# Altium PCB SuperKnob.PcbDoc
Units mil, origin at the board's own origin, x right, y up, seen from the top; angles counter-clockwise.
Board outline 1732.28 x 1732.28 mil, 4 copper layers (Layer 1, Layer 2, Layer 3, Layer 4), stack 23.756 mil thick; 76 components, 55 nets, 268 pads, 226 vias.
Unrouted connection lines stored in the file: 57.
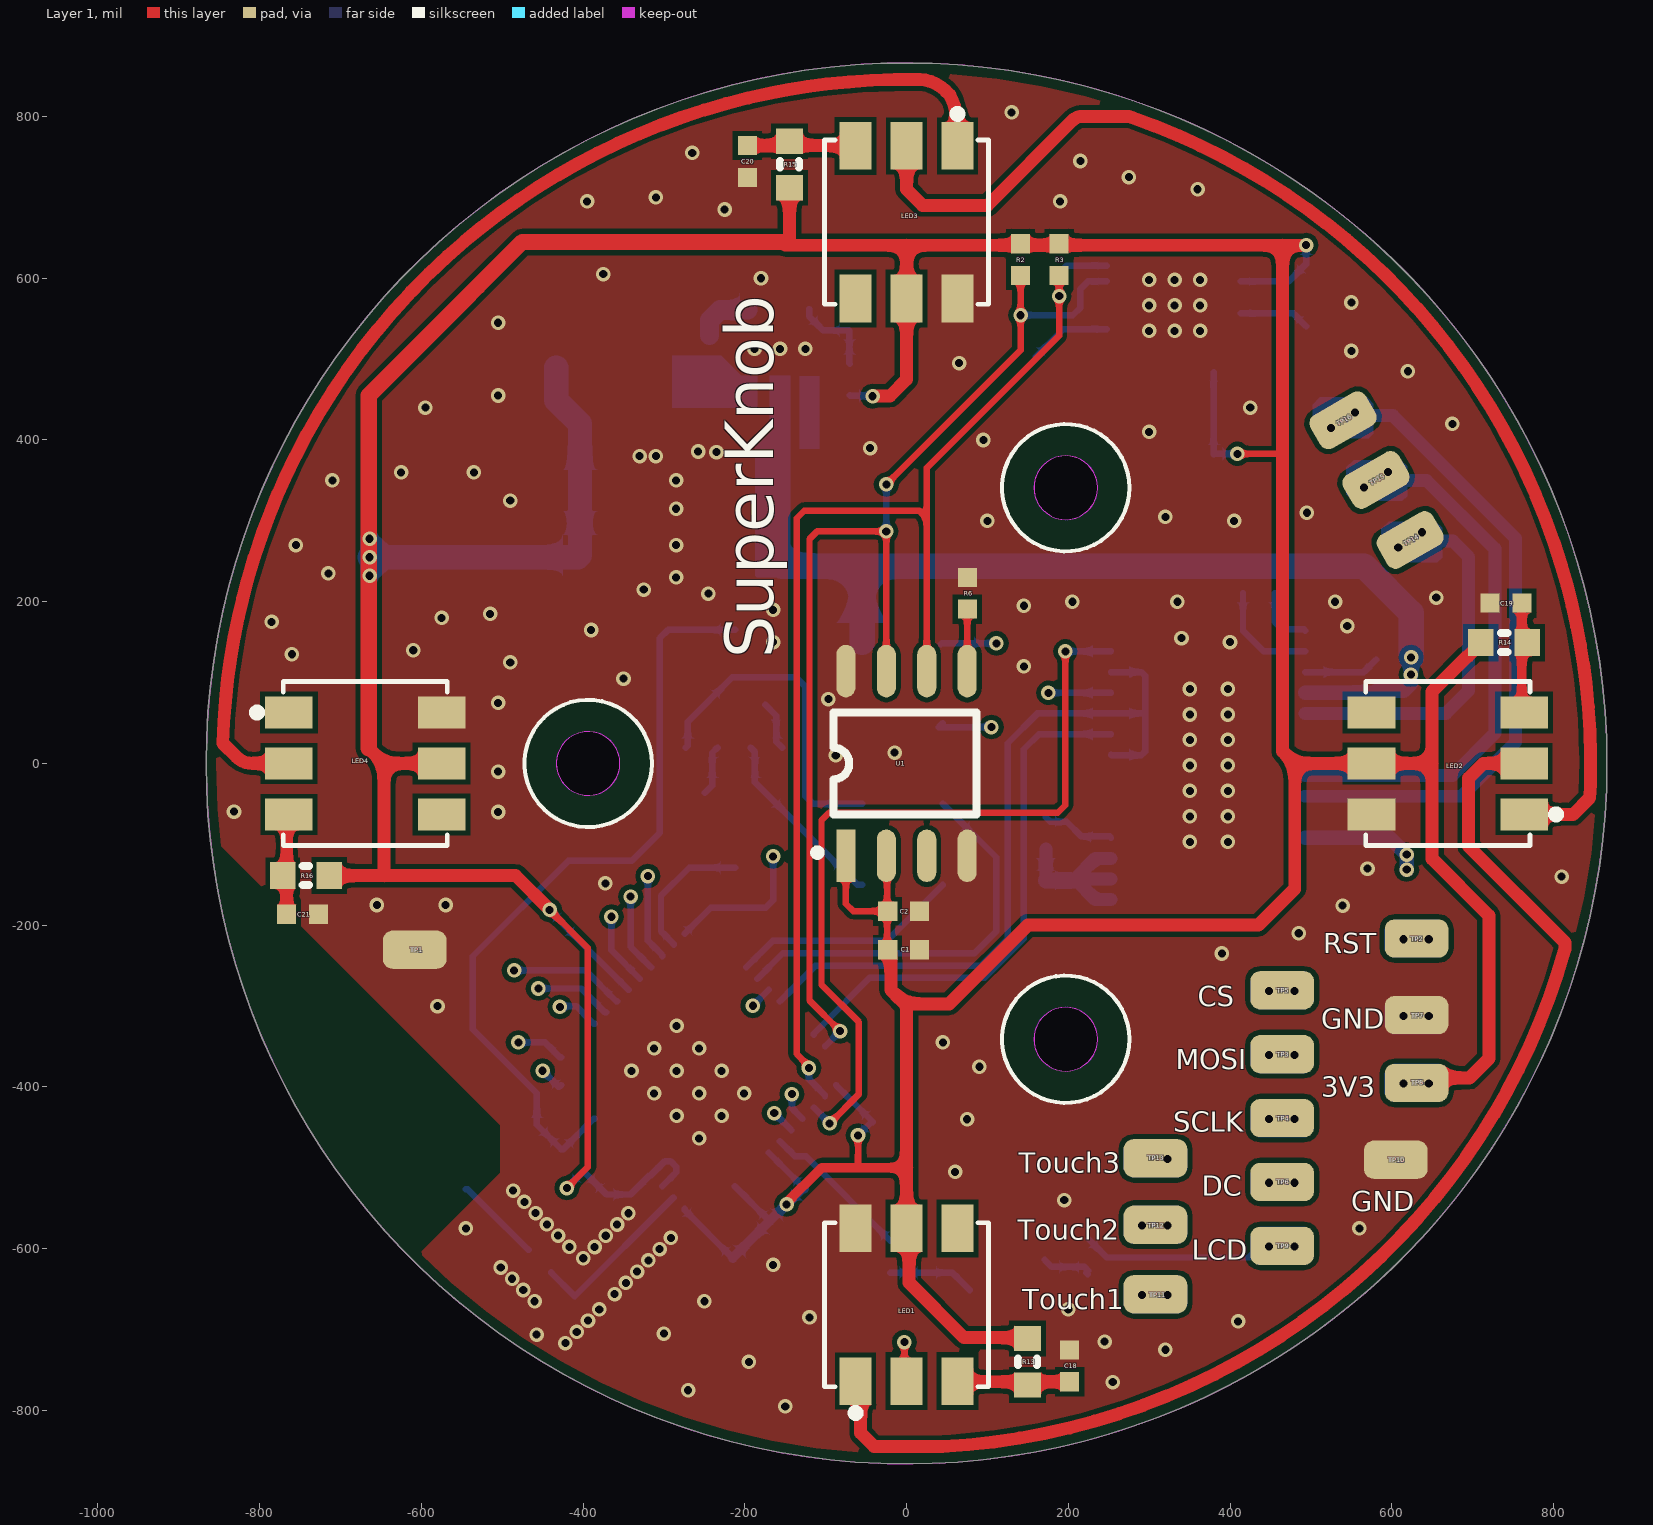
[diagram p0: Layer 1 view]
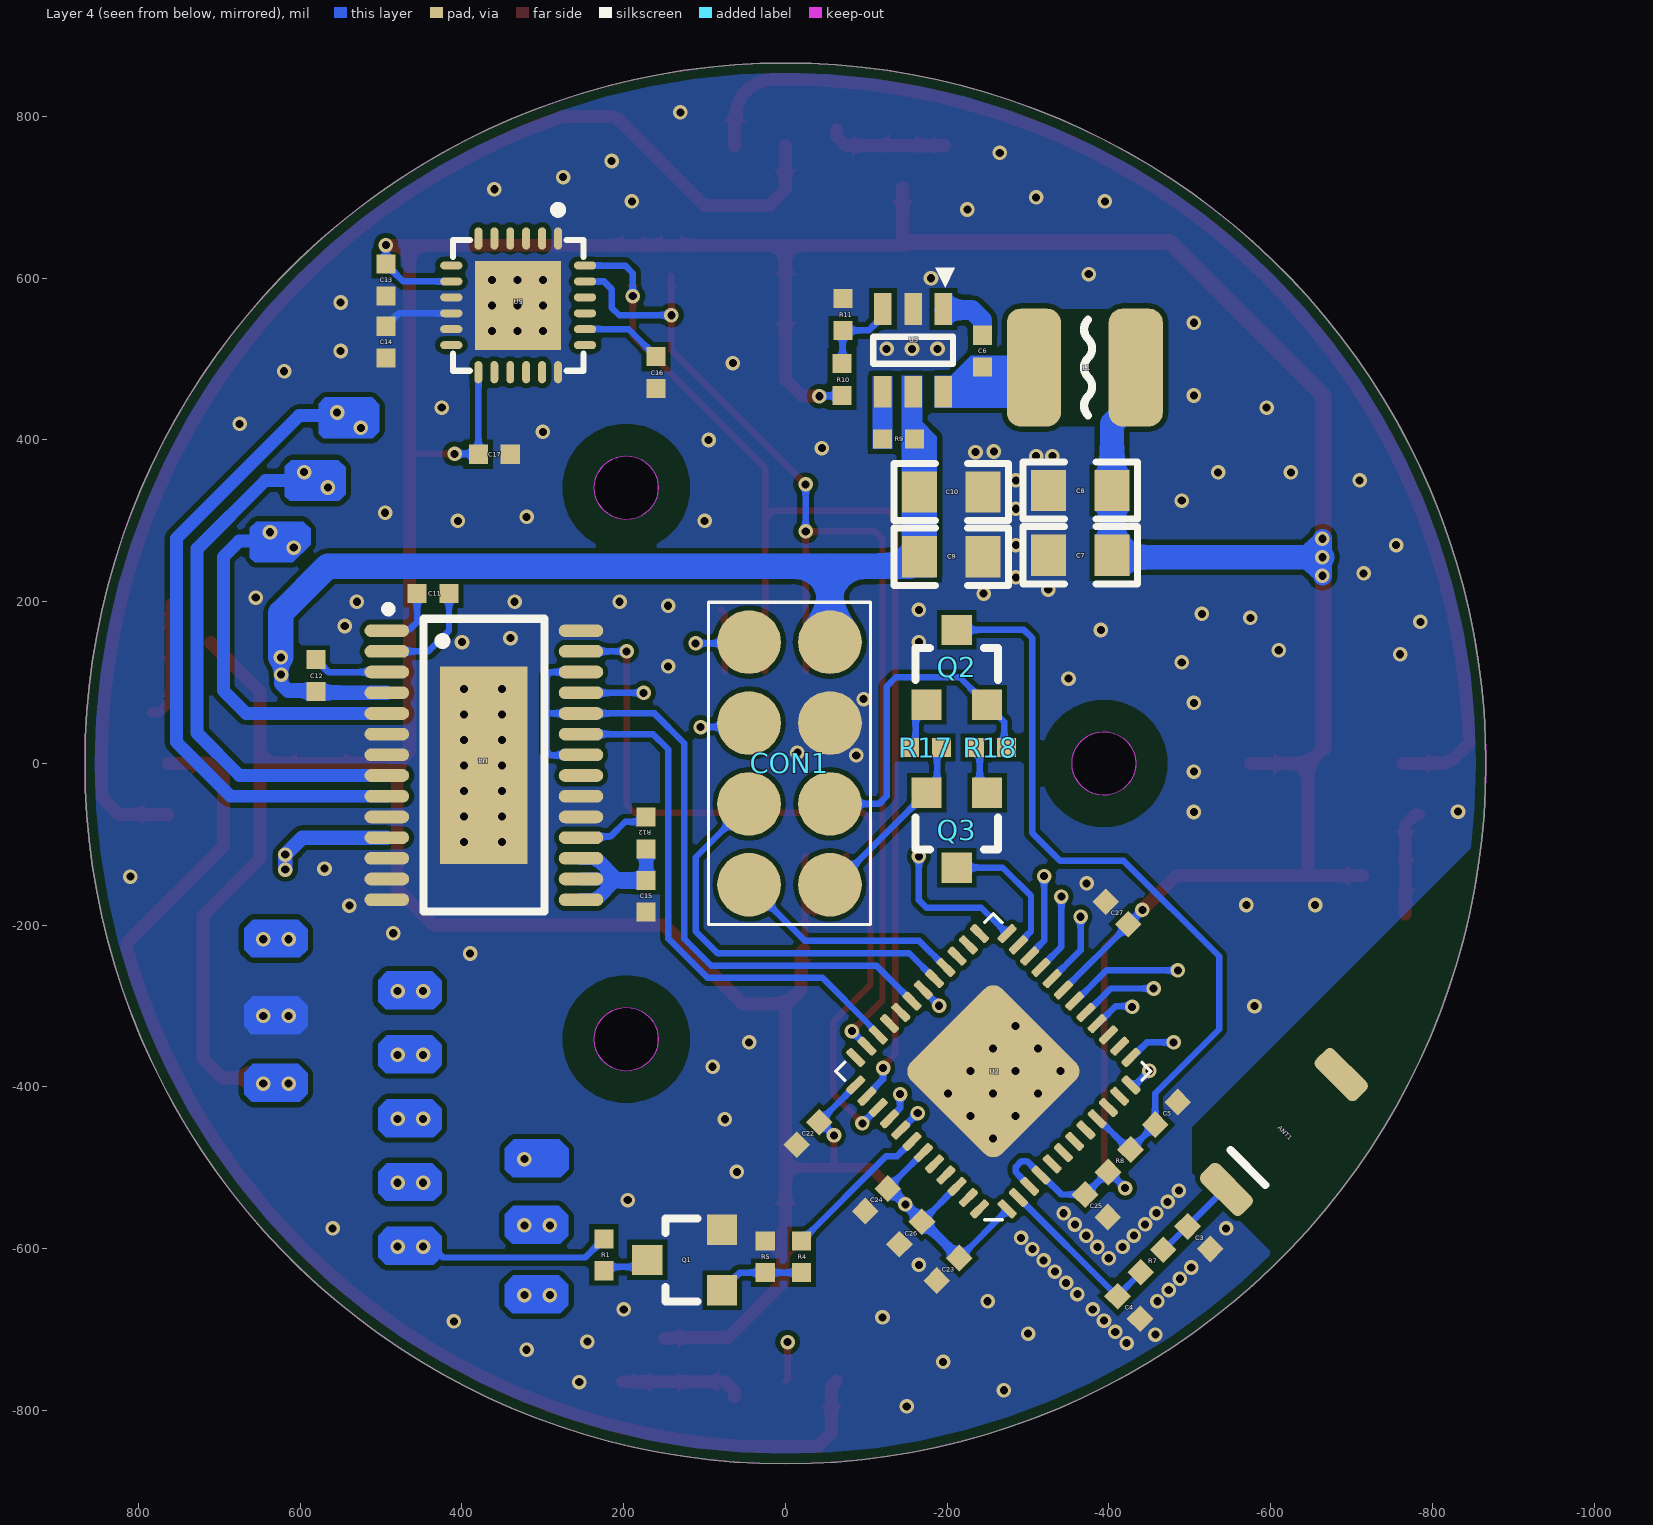
[diagram p1: Layer 4 view, seen from below]
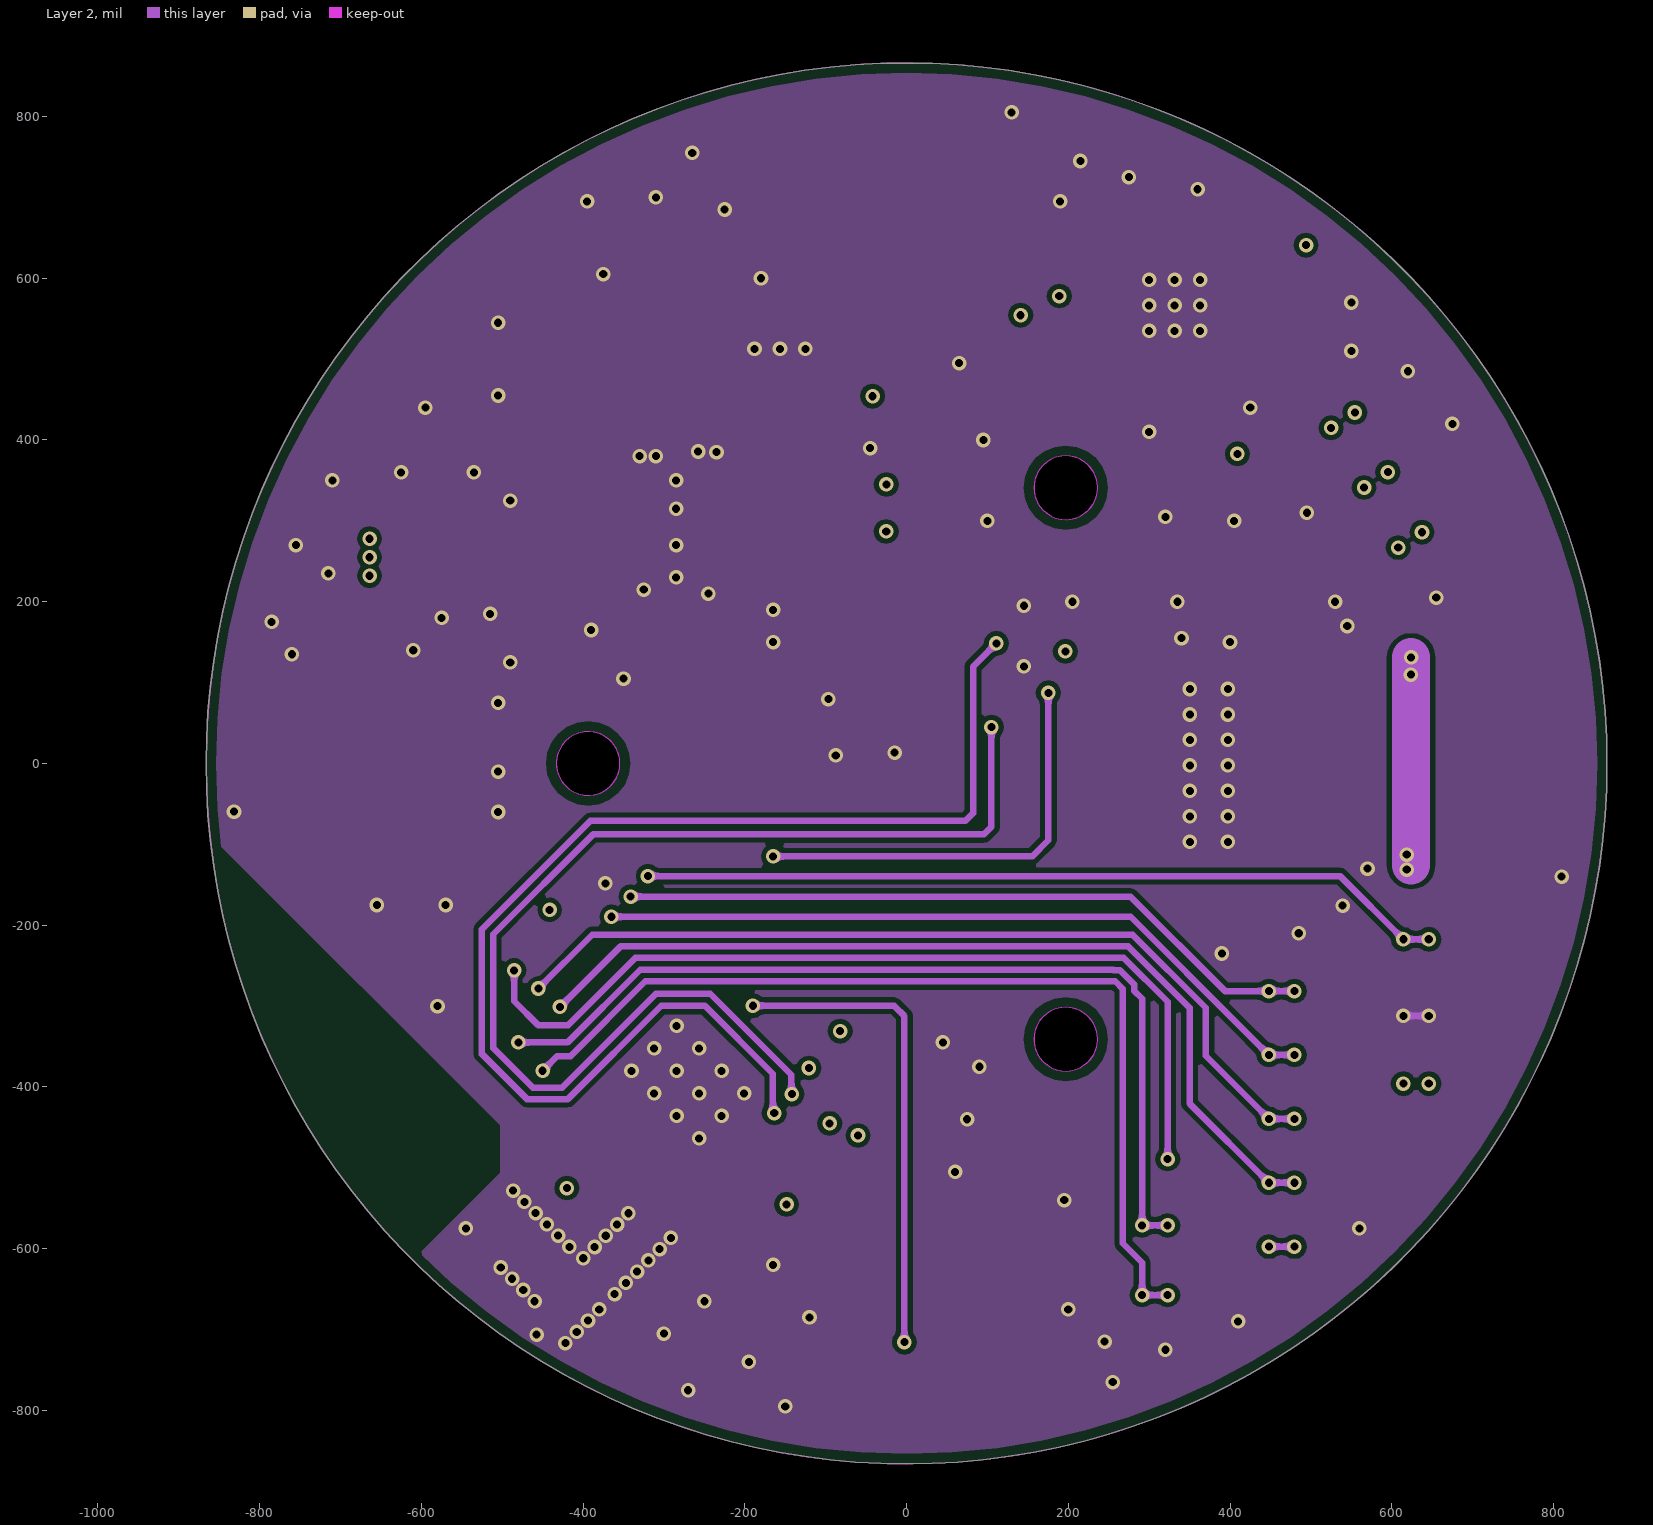
[diagram p2: Layer 2]
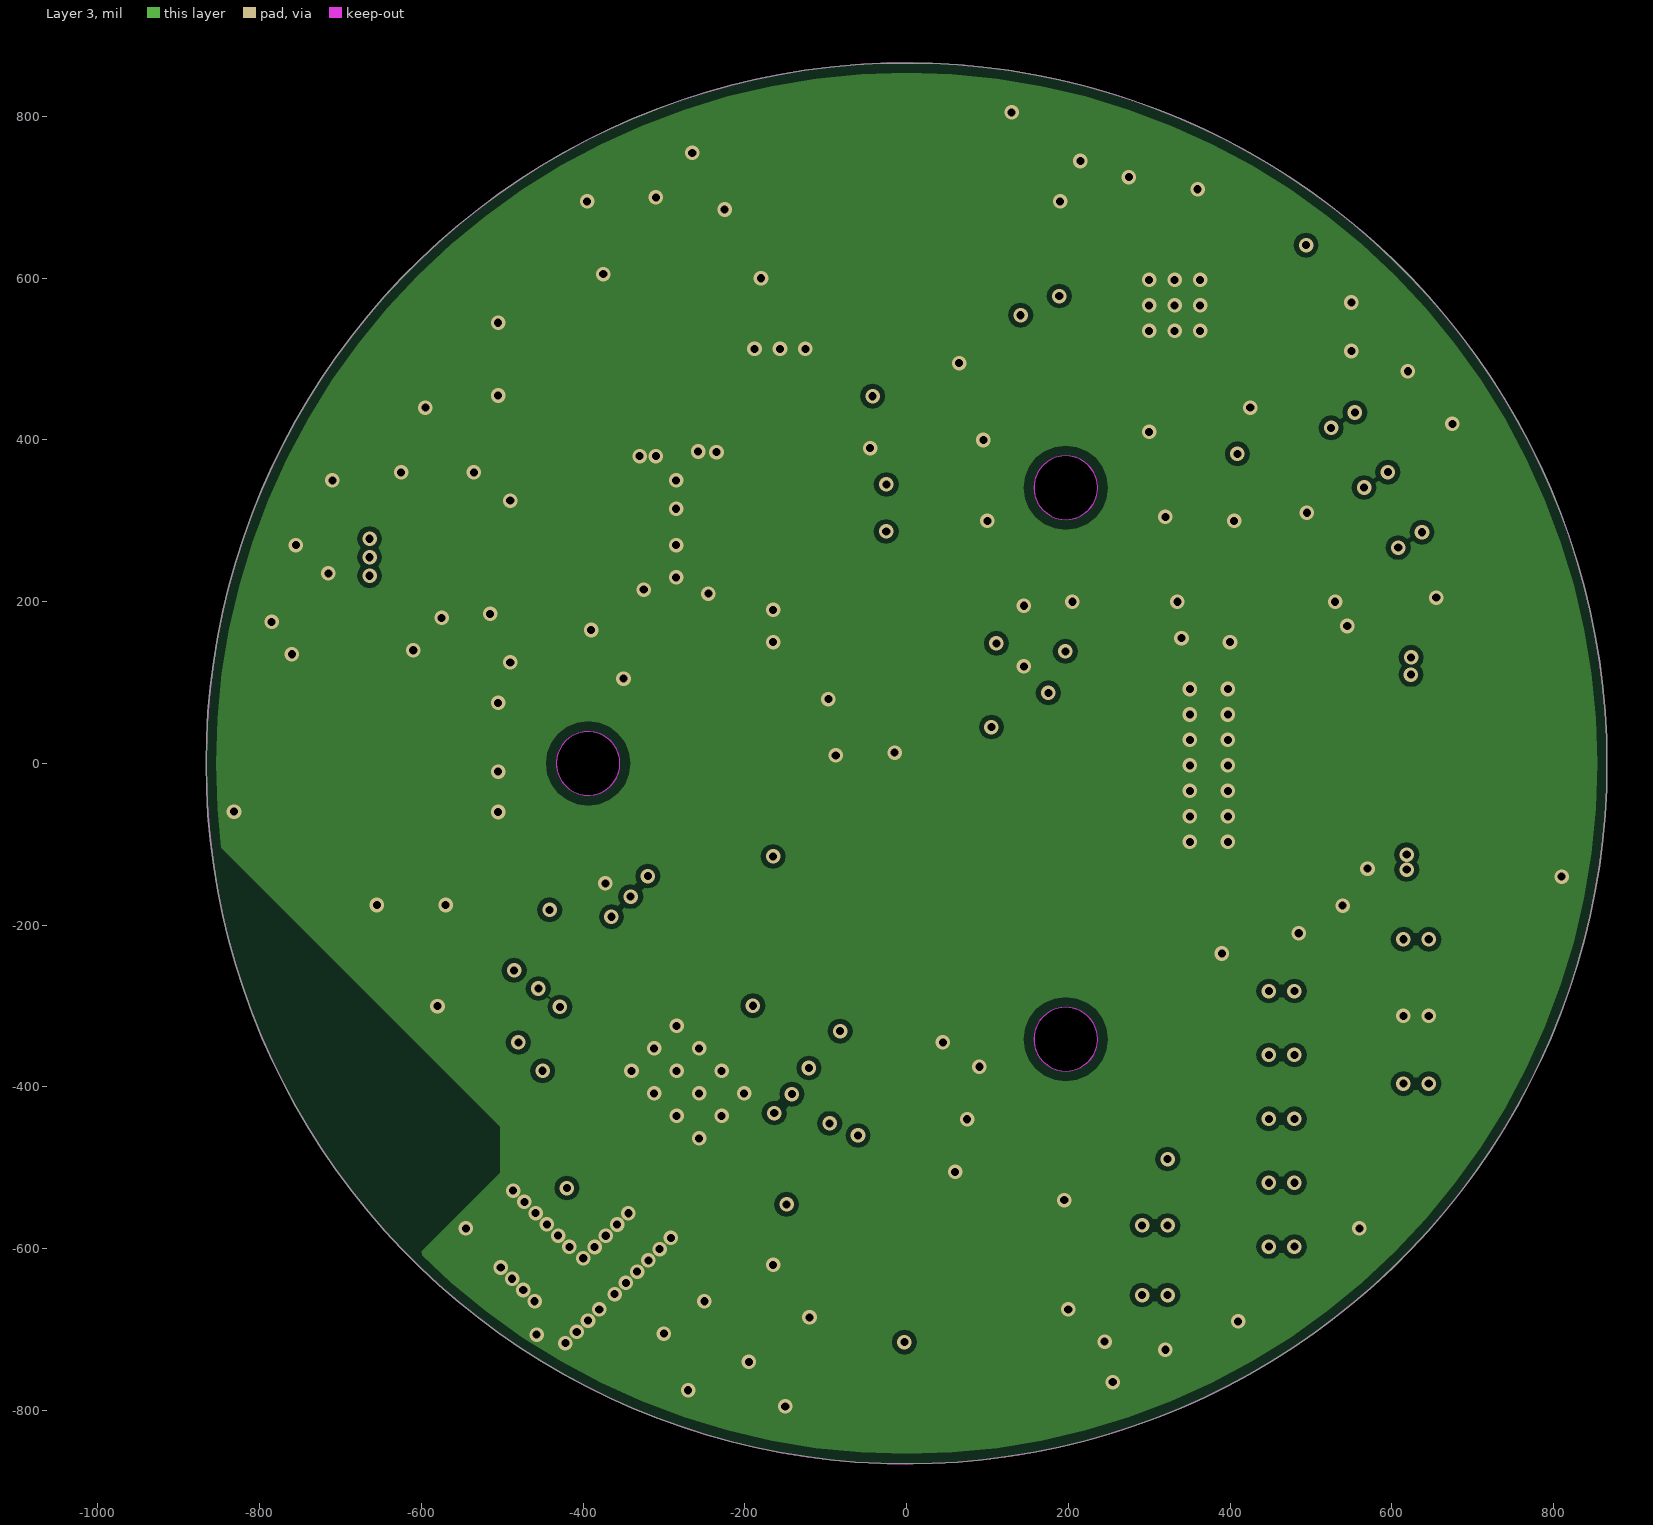
[diagram p3: Layer 3]
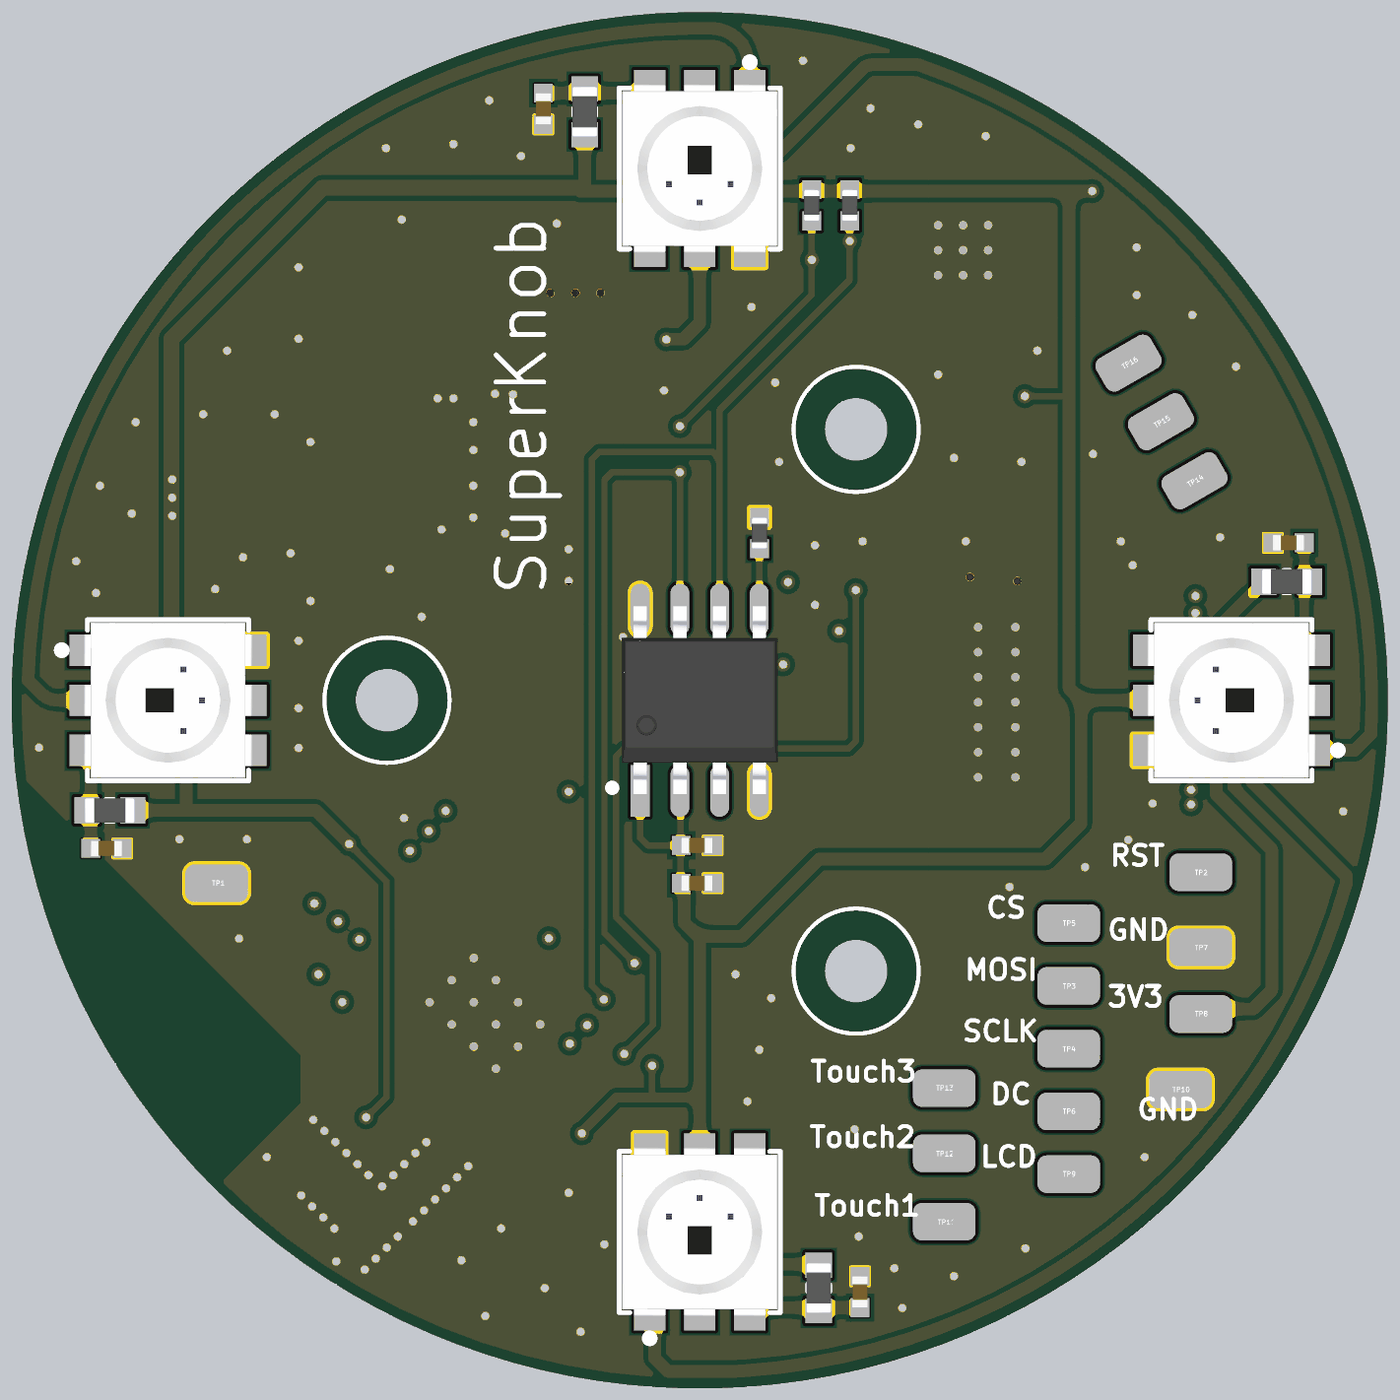
[diagram p4: 3D render of the assembled board from above, using the file's embedded part models]
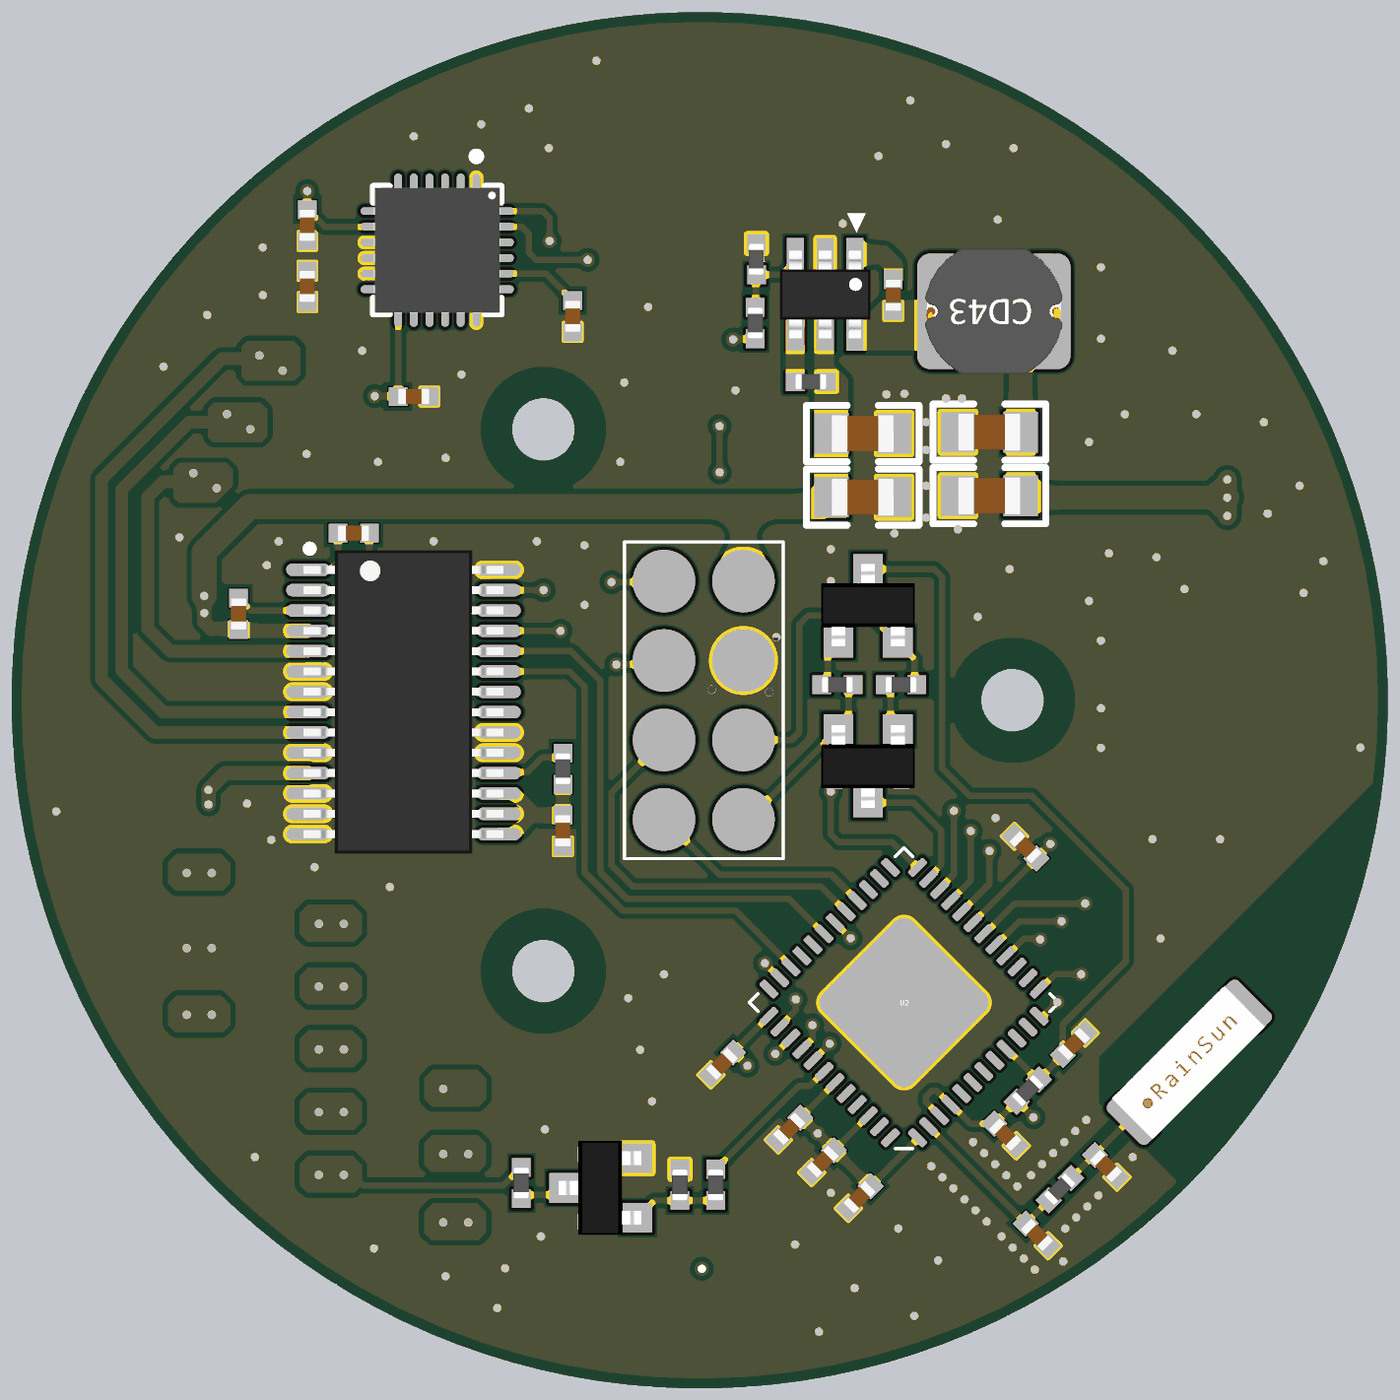
[diagram p5: 3D render of the assembled board from below, using the file's embedded part models]

## Layer stack, top to bottom
Top Solder: solder mask 0.4, Solder Resist, Dk 3.5
Layer 1: signal copper 1.4
Dielectric 2: prepreg 2.8, PP-006, Dk 4.1
Layer 2: signal copper 1.378
Dielectric 1: dielectric 12.6, FR-4, Dk 4.8
Layer 3: signal copper 1.378
Dielectric 3: prepreg 2.8, PP-006, Dk 4.1
Layer 4: signal copper 1.4
Bottom Solder: solder mask 0.4, Solder Resist, Dk 3.5

## Board outline
-866.14,0 ccw(c0,0) 0,-866.14 ccw(c0,0) 866.14,0 ccw(c0,0) 0,866.14 ccw(c0,0)
cut-out: 157.48,340.95 ccw(c196.85,340.95) 196.85,301.58 ccw(c196.85,340.95) 236.22,340.95 ccw(c196.85,340.95) 196.85,380.32 ccw(c196.85,340.95)
cut-out: 157.48,-340.95 ccw(c196.85,-340.95) 196.85,-380.32 ccw(c196.85,-340.95) 236.22,-340.95 ccw(c196.85,-340.95) 196.85,-301.58 ccw(c196.85,-340.95)
cut-out: -393.7,-39.37 ccw(c-393.7,0) -354.33,0 ccw(c-393.7,0) -393.7,39.37 ccw(c-393.7,0) -433.07,0 ccw(c-393.7,0)

## Design rules (kind name [scope] priority, off if disabled: settings)
Clearance Clearance_UVW1 [InComponent('TP14') vs InComponent('TP15')] p1: gap=0 ignorepadtopadclearanceinfootprint=FALSE
Clearance Clearance_UVW [InComponent('R15') vs InComponent('TP16')] p2: gap=0 ignorepadtopadclearanceinfootprint=FALSE
Clearance Clearance_outline [OnLayer('Keep-Out Layer')] p3: gap=12 ignorepadtopadclearanceinfootprint=FALSE
Clearance [All] p4: gap=6 ignorepadtopadclearanceinfootprint=FALSE except(8: Arc-Via Arc-Hole Track-Via Track-Hole SMDPad-SMDPad SMDPad-Via SMDPad-Hole THPad-Via THPad-Hole Via-Via Via-Hole Fill-Hole Poly-Hole Region-Hole Text-Hole)
DiffPairsRouting [All] p1: maxlimit=10 minlimit=8 mostfreqgap=8 toplayer_minwidth=8 toplayer_maxwidth=8 toplayer_prefwidth=8 midlayer1_minwidth=8 midlayer1_maxwidth=8 midlayer1_prefwidth=8 midlayer2_minwidth=8 midlayer2_maxwidth=8 midlayer2_prefwidth=8 bottomlayer_minwidth=8 bottomlayer_maxwidth=8 bottomlayer_prefwidth=8 maxuncoupledlength=500
HoleToHoleClearance [All] p1: gap=0 allowstackedmicrovias=TRUE
MinimumSolderMaskSliver [All] p1: minsoldermaskwidth=0
PolygonConnect [All] p1: connectstyle=Direct reliefconductorwidth=10 reliefentries=4 polygonreliefangle="90 Angle" airgapwidth=10
RoutingVias [All] p1: holewidth=10 width=18 viastyle="Through Hole" minholewidth=10 minwidth=18 maxholewidth=10 maxwidth=18
SilkToSilkClearance [All] p1: silktosilkclearance=0
SilkToSolderMaskClearance [IsPad] p1: minsilkscreentomaskgap=0 clearancetoexposedcopper=TRUE
SolderMaskExpansion [All] p1: expansion=4 istentingtop=FALSE
Width [All] p1: maxlimit=100 minlimit=6 preferedwidth=6
25 further rules are at their usual default settings.

## Components (designator, comment, footprint, x,y, rotation, side; value= is the part's Value field where it differs from the comment)
ANT1 "RAINSUN" ANT-Rainsun-AN5120 -615.91,-456.04 r135 bottom
C1 "100nF/25V" CAPC_0402 -3.5,-230.32 r180 top value=0.1u
C2 "10uF/10V" CAPC_0402 -3.5,-182.7 r180 top value=0.1u
C3 "NC" CAPC_0402 -511.25,-586.3 r45 bottom value=0.1u
C4 "NC" CAPC_0402 -424.51,-672.83 r45 bottom value=0.1u
C5 "100nF/25V" CAPC_0402 -471.1,-432.7 r315 bottom value=0.1u
C6 "10nF/25V" CAPC_0402 -243.62,509.84 r90 bottom value=0.1u
C7 "22uF/6.3V" CAPC_0805 -364.48,257.42 r180 bottom value=0.1u
C8 "22uF/6.3V" CAPC_0805 -364.48,337.47 r180 bottom value=0.1u
C9 "10uF/16V" CAPC_0805 -205.18,255.64 r0 bottom value=0.1u
C10 "10uF/16V" CAPC_0805 -205.18,335.64 r0 bottom value=0.1u
C11 "10nF/25V" CAPC_0402 435.72,210.37 r0 bottom value=0.1u
C12 "100nF/25V" CAPC_0402 580.53,108.71 r90 bottom value=0.1u
C13 "10nF/25V" CAPC_0402 494.02,597.86 r90 bottom value=0.1u
C14 "100nF/25V" CAPC_0402 494.02,520.99 r270 bottom value=0.1u
C15 "470nF/25V" CAPC_0402 172.31,-164.18 r90 bottom value=0.1u
C16 "2.2nF/25V" CAPC_0402 160,483.38 r270 bottom value=0.1u
C17 "100nF/25V" CAPC_0402 360.01,382.36 r0 bottom value=0.1u
C18 "100nF/25V" CAPC_0402 201.72,-744.85 r90 top value=0.1u
C19 "100nF/25V" CAPC_0402 741.13,198.19 r180 top value=0.1u
C20 "100nF/25V" CAPC_0402 -196.9,744.44 r90 top value=0.1u
C21 "100nF/25V" CAPC_0402 -746.79,-186.49 r180 top value=0.1u
C22 "1uF/10V" CAPC_0402 -27.95,-457.56 r135 bottom value=0.1u
C23 "1uF/10V" CAPC_0402 -201.02,-625.58 r135 bottom value=0.1u
C24 "100pF/25V" CAPC_0402 -112.67,-539.51 r315 bottom value=0.1u
C25 "100nF/25V" CAPC_0402 -384.5,-546.92 r45 bottom value=0.1u
C26 "100nF/25V" CAPC_0402 -154.79,-580.63 r135 bottom value=0.1u
C27 "100nF/25V" CAPC_0402 -410,-185 r225 bottom value=0.1u
CON1 "POGOPIN_8pin" POGOPIN_8pin -5,0 r270 bottom
L1 "2.2uH/2A" Inductor_CD_43 -370.21,489.57 r0 bottom value=WPN4020H2R2MT
LED1 "WS2812S-W" LED-SMD_6P-L5.0-W5.0-TL 0,-669.29 r90 top
LED2 "WS2812S-W" LED-SMD_6P-L5.0-W5.0-TL 669.29,0 r180 top
LED3 "WS2812S-W" LED-SMD_6P-L5.0-W5.0-TL 0,669.29 r270 top
LED4 "WS2812S-W" LED-SMD_6P-L5.0-W5.0-TL -669.29,0 r0 top
Q1 "AO3400" SOT23_3 124.69,-613.88 r180 bottom
Q2 "MMBT3904" SOT23_3 -211.87,118.9 r270 bottom
Q3 "MMBT3904" SOT23_3 -211.87,-82.57 r90 bottom
R1 "10R" RESC_0402#1 224.59,-607.57 r90 bottom value=22R
R2 "10K" RESC_0402#1 140.94,623.02 r90 top value=22R
R3 "10K" RESC_0402#1 188.74,623.02 r90 top value=22R
R4 "100R" RESC_0402#1 -20,-610 r270 bottom value=22R
R5 "10K" RESC_0402#1 25,-610 r90 bottom value=22R
R6 "1K" RESC_0402#1 75.17,210.5 r90 top value=22R
R7 "0R" RESC_0402#1 -453.16,-615.29 r315 bottom value=22R
R8 "10K" RESC_0402#1 -412.89,-491.28 r135 bottom value=22R
R9 "100K" RESC_0402#1 -139.87,401 r0 bottom value=22R
R10 "100K" RESC_0402#1 -69.97,474.84 r90 bottom value=22R
R11 "22.2K" RESC_0402#1 -71.34,555.17 r90 bottom value=22R
R12 "10K" RESC_0402#2 172.31,-86.13 r270 bottom value=22R
R13 "150R" RESC_0603 149.7,-739.81 r270 top value=22R
R14 "150R" RESC_0603 738.93,149.42 r0 top value=22R
R15 "150R" RESC_0603 -144.75,740.79 r90 top value=22R
R16 "150R" RESC_0603 -742.64,-138.62 r180 top value=22R
R17 "12K" RESC_0402#1 -173.28,19.62 r180 bottom value=22R
R18 "12K" RESC_0402#1 -253.4,19.62 r180 bottom value=22R
TP1 "TP" TP -608.11,-230.32 r90 top
TP2 "TP" TP 630.72,-216.51 r270 top
TP3 "TP" TP 464.46,-359.53 r270 top
TP4 "TP" TP 464.46,-438.53 r270 top
TP5 "TP" TP 464.46,-280.53 r270 top
TP6 "TP" TP 464.46,-517.53 r270 top
TP7 "TP" TP 630.72,-311.17 r270 top
TP8 "TP" TP 630.72,-395.01 r270 top
TP9 "TP" TP 464.46,-596.53 r270 top
TP10 "TP" TP 605,-490 r90 top
TP11 "TP" TP 307.84,-656.41 r270 top
TP12 "TP" TP 307.84,-570.34 r270 top
TP13 "TP" TP 307.84,-488.25 r270 top
TP14 "U" TP 622.72,276.28 r120 top
TP15 "V" TP 580.47,350.57 r120 top
TP16 "W" TP 539.72,424.35 r120 top
U1 "AS5600-ASOT" SOIC_8 0,0 r0 top locked
U2 "ESP32_SIP" QFN-48_7X7 -257.07,-380.55 r45 bottom locked
U3 "LP6460B6F" SOT23_6 -157.91,510.78 r270 bottom
U4 "DRV8313PWP" TSSOP_28 372.89,-2.14 r270 bottom
U5 "MPU6050" QFN-24 330.46,566.49 r270 bottom

## Footprints (in the part's own frame and the unit in brackets; to place one, negate y for a bottom-side part, rotate by r counter-clockwise, add the part's x,y. Pads: shape width x height; smd on the part's side, far side on the other; paste and mask are expansions set on the pad)
ANT-Rainsun-AN5120 [mm] "选择焊盘"
  rrect50% 0.8x1.8 smd: 1(-2.54,0) ""(2.563,0)
  silkscreen extent -1.57,-0.76 -1.57,0.79, body extent -2.57,-0.91 2.54,0.94, height 1.32
CAPC_0402 [mm]
  rect 0.6x0.6 smd mask+0.051: 1(-0.5,0) 2(0.5,0)
  body extent -0.5,-0.25 0.5,0.25, height 0.5
CAPC_0805 [mm]
  rect 1.1x1.3 smd: 1(-1,0) 2(1,0)
  silkscreen extent -1.8,-0.9 1.8,0.9, body extent -1,-0.6 1,0.6, height 0.95
Inductor_CD_43 [mm]
  rrect50% 1.7x3.7 smd: 1(-1.6,0) 2(1.6,0)
  silkscreen extent -0.22,-1.5 0.02,1.5, body extent -2.2,-2 2.2,2, height 3.25
LED-SMD_6P-L5.0-W5.0-TL [mm]
  rect 1.5x1 smd: 1(-2.4,1.6) 2(-2.4,0) 3(-2.4,-1.6) 4(2.4,-1.6) 5(2.4,0) 6(2.4,1.6)
  silkscreen extent -3.52,-2.58 2.58,2.58, body extent -2.7,-2.47 2.7,2.47, height 1.6
POGOPIN_8pin [mm] "POGOPIN"
  round 2 smd: 1(-3.81,1.27) 2(-1.27,1.27) 3(1.27,1.27) 4(3.81,1.27) 5(3.81,-1.27) 6(1.27,-1.27) 7(-1.27,-1.27) 8(-3.81,-1.27)
  silkscreen extent -5.06,-2.54 5.06,2.54
QFN-24 [mm] "QFN, 24-Leads, Body 4.1x4.1mm (max), Pitch 0.50mm, IPC Low Density"
  oval 0.7x0.25 smd: 1(-2.1,1.25) 2(-2.1,0.75) 3(-2.1,0.25) 4(-2.1,-0.25) 5(-2.1,-0.75) 6(-2.1,-1.25) 13(2.1,-1.25) 14(2.1,-0.75) 15(2.1,-0.25) 16(2.1,0.25) 17(2.1,0.75) 18(2.1,1.25)
  oval 0.25x0.7 smd: 7(-1.25,-2.1) 8(-0.75,-2.1) 9(-0.25,-2.1) 10(0.25,-2.1) 11(0.75,-2.1) 12(1.25,-2.1) 19(1.25,2.1) 20(0.75,2.1) 21(0.25,2.1) 22(-0.25,2.1) 23(-0.75,2.1) 24(-1.25,2.1)
  rect 2.8x2.7 smd: 18(0,0)
  silkscreen extent -3.12,-2.05 2.05,2.05, body extent -2.02,-2.02 2.02,2.02, height 0.95
QFN-48_7X7 [mm]
  rrect20% 4.064x4.064 smd: 0(0,0)
  rrect50% 0.675x0.25 smd: 1(-3.363,2.75) 2(-3.363,2.25) 3(-3.363,1.75) 4(-3.363,1.25) 5(-3.363,0.75) 6(-3.362,0.25) 7(-3.362,-0.25) 8(-3.363,-0.75) 9(-3.363,-1.25) 10(-3.363,-1.75) 11(-3.363,-2.25) 12(-3.363,-2.75) 25(3.363,-2.75) 26(3.363,-2.25) 27(3.363,-1.75) 28(3.363,-1.25) 29(3.363,-0.75) 30(3.362,-0.25) 31(3.362,0.25) 32(3.363,0.75) 33(3.363,1.25) 34(3.363,1.75) 35(3.363,2.25) 36(3.363,2.75)
  rrect50% 0.25x0.675 smd: 13(-2.75,-3.363) 14(-2.25,-3.363) 15(-1.75,-3.363) 16(-1.25,-3.363) 17(-0.75,-3.363) 18(-0.25,-3.362) 19(0.25,-3.362) 20(0.75,-3.363) 21(1.25,-3.363) 22(1.75,-3.363) 23(2.25,-3.363) 24(2.75,-3.363) 37(2.75,3.363) 38(2.25,3.363) 39(1.75,3.363) 40(1.25,3.363) 41(0.75,3.363) 42(0.25,3.362) 43(-0.25,3.362) 44(-0.75,3.363) 45(-1.25,3.363) 46(-1.75,3.363) 47(-2.25,3.363) 48(-2.75,3.363)
  silkscreen extent -3.5,-3.5 3.5,3.5, body extent -3.5,-3.5 3.5,3.5, height 1
RESC_0402#1 [mm]
  rect 0.6x0.6 smd: 1(-0.5,0) 2(0.5,0)
  body extent -0.5,-0.25 0.5,0.25, height 0.38
RESC_0402#2 [mm]
  rect 0.6x0.6 smd mask+0.051: 1(-0.5,0) 2(0.5,0)
  body extent -0.5,-0.25 0.5,0.25, height 0.38
RESC_0603 [mm]
  rect 0.8x0.85 smd: 1(-0.73,0) 2(0.73,0)
  silkscreen extent -0.1,-0.3 0.1,0.3, body extent -0.8,-0.4 0.8,0.4, height 0.38
SOIC_8 [mm]
  rect 0.6x1.65 smd: 1(-1.905,-2.9)
  oval 0.6x1.65 smd: 2(-0.635,-2.9) 3(0.635,-2.9) 4(1.905,-2.9) 5(1.905,2.9) 6(0.635,2.9) 7(-0.635,2.9) 8(-1.905,2.9)
  silkscreen extent -2.9,-2.9 2.2,1.6, body extent -2.5,-3.01 2.5,3.01, height 1.75
SOT23_3 [mm]
  rect 0.95x0.95 smd: 1(1.175,-0.95) 2(1.175,0.95) 3(-1.175,0)
  silkscreen extent -0.6,-1.3 0.4,1.3, body extent -1.34,-1.5 1.3,1.5, height 1.08
SOT23_6 [mm]
  rect 1x0.55 smd: 1(-1.3,0.95) 2(-1.3,0) 3(-1.3,-0.95) 4(1.3,-0.95) 5(1.3,0) 6(1.3,0.95)
  silkscreen extent -2.6,-1.25 0.43,1.3, body extent -1.4,-1.45 1.4,1.45, height 1.45
TP [mm]
  rrect50% 1.2x2 smd: 1(0,0)
TSSOP_28 [mm] "0.65"
  oval 0.4x1.4 smd: 1(-4.225,-3.05) 2(-3.575,-3.05) 3(-2.925,-3.05) 4(-2.275,-3.05) 5(-1.625,-3.05) 6(-0.975,-3.05) 7(-0.325,-3.05) 8(0.325,-3.05) 9(0.975,-3.05) 10(1.625,-3.05) 11(2.275,-3.05) 12(2.925,-3.05) 13(3.575,-3.05) 14(4.225,-3.05) 15(4.225,3.05) 16(3.575,3.05) 17(2.925,3.05) 18(2.275,3.05) 19(1.625,3.05) 20(0.975,3.05) 21(0.325,3.05) 22(-0.325,3.05) 23(-0.975,3.05) 24(-1.625,3.05) 25(-2.275,3.05) 26(-2.925,3.05) 27(-3.575,3.05) 28(-4.225,3.05)
  rect 6.2x2.75 smd: 29(0,0)
  silkscreen extent -5,-3.1 4.6,1.9, body extent -4.85,-3.2 4.85,3.2, height 1.2

## Part data
ANT1: library part ANT-Rainsun-AP5120, "贴片天线"
C1 C2 C3 C4 C5 C6 C7 C8 C9 C10 C11 C12 C13 C14 C15 C16 C17 C18 C19 C20 C21 C22 C23 C24 C25 C26 C27: library part 电容-0402, "贴片电容"
CON1: "磁吸连接器"
L1: library part PL4020, "贴片电感", Material name=功率电感, PCB DECAL=PL4020
LED1 LED2 LED3 LED4: BOM_JLCPCB Part Class="Extended Part", BOM_Manufacturer=Worldsemi, BOM_Manufacturer Part=WS2812S-W, BOM_Supplier=LCSC, BOM_Supplier Part=C114584, Contributor=LCSC, spicePre=L, spiceSymbolName=WS2812S-W
Q1: library part FH3400C, BOM_JLCPCB Part Class="Extended Part", BOM_Manufacturer=鑫飞宏, BOM_Manufacturer Part=FH3400C, BOM_Supplier=LCSC, BOM_Supplier Part=C2940037, Contributor=LCSC, spicePre=Q, spiceSymbolName=FH3400C
Q2 Q3: library part SMT_TRIODE_NPN, "Surface mount NPN transistor, package SOT-23"
R1 R2 R3 R4 R5 R6 R7 R8 R9 R10 R11 R12 R13 R14 R15 R16 R17 R18: library part 电阻-0402, "贴片电阻"
TP1 TP2 TP3 TP4 TP5 TP6 TP7 TP8 TP9 TP10 TP11 TP12 TP13: "测试点"
TP14 TP15 TP16: library part TP, "测试点"
U1: "磁编码器", BOM_JLCPCB Part Class="Extended Part", BOM_Manufacturer="Advanced Monolithic Systems", BOM_Manufacturer Part=AS5600-ASOT, BOM_Supplier=LCSC, BOM_Supplier Part=C499458, Contributor=LCSC, spicePre=U, spiceSymbolName=AS5600-ASOT
U2: library part ESP32-PICO, "主控芯片"
U3: "DC-DC芯片"
U4: "驱动芯片", BOM_Manufacturer=TI(德州仪器), BOM_Manufacturer Part=DRV8313PWP, BOM_Supplier=LCSC, BOM_Supplier Part=C2863441, Contributor=LCSC, spicePre=U, spiceSymbolName=DRV8313PWP
U5: "六轴传感器"

## Via types
v1: diameter 18, hole 10, Layer 1 to Layer 4, tented both sides, 226 vias

## Nets (pads, with @x,y where several pads share a name; then routed paths per layer and width w, separated by ;. In a path a pad name is that pad's centre, name@x,y a point inside that pad or via, vN(x,y) a via of type N, cw(c..) or ccw(c..) an arc to the next point about the centre after c; other vN are vias at no path point)
3V3: C1.2 C2.2 C7.2 C8.2 C13.2 C17.2 C22.2 C23.2 C24.1 C25.2 C26.2 C27.2 L1.1 LED1.5 LED2.5 LED3.5 LED4.5 R2.2 R3.2 R8.1 R10.1 R13.1 R14.1 R15.1 R16.1 TP8.1 U1.1 U1.2 U2.1 U2.3 U2.4 U2.19 U2.37 U2.43 U2.46 U5.8 U5.13 | length 7861.4
  Layer 1 w8: v1(-441.27,-180.99) -394.1,-228.16 -394.1,-499.1 v1(-420,-525) ; U1.1 -75,-173.33 -65.63,-182.7 C2.2@-24.09,-182.7 ; -60,-500 v1(-60,-460) ; U1.2 -24.09,-115.08 C2.2@-24.09,-182.7 ; C1.2 -24.09,-229.41 C2.2@-24.09,-182.7 ; C2.2 C2.2@-24.09,-182.7 ; v1(409.14,382.84) 462.84,382.84 465,385
  Layer 1 w12: v1(-148.39,-545.16) -149.84,-545.16 -150,-545 -105,-500 -60,-500 0,-500
  Layer 1 w16: R16.1 -645,-138.62 ; -665,18.75 -646.25,0 ; LED4.5 -646.25,0 ; v1(-441.27,-180.99) -483.64,-138.62 -645,-138.62 ; -150,640.78 0.2,640.78 ; -150,645 -144.76,650.25 R15.1 ; v1(-41.99,454.11) -41.61,454.49 -20.51,454.49 0,475 LED3.5 0.2,575.01 0.2,640.78 ; C1.2 -19.37,-234.13 -19.37,-280.11 -2.27,-297.21 ; R13.1 142.04,-711.07 140.97,-710 71.03,-710 3.17,-642.14 3.17,-577.98 LED1.5 0,-500 0,-299.48 -2.27,-297.21 ; v1(494.02,640.86) v1(494.02,640.86) 465,640.78 ; TP8.1@645.78,-388.74 696.26,-388.74 720,-365 720,-187.96 650,-117.96 650,0 ; R14.1 710.19,148.43 694.19,132.43 693.21,132.43 650,89.22 650,0 ; -646.25,0 -646.25,-137.37 -645,-138.62 ; -2.27,-297.21 52.79,-297.21 150,-200 435,-200 480,-155 480,0 ; 0.2,640.78 465,640.78 ; 465,640.78 465,385 465,15 480,0 ; 480,0 LED2.5 650,0
  Layer 1 w20: -665,18.75 v1@-665,232.13 ; -665,185 v1@-665,232.13 ; -665,310 v1@-665,277.87 ; -150,645 -475,645 -530,590 -548.49,571.51 -566.99,553.01 -665,455 v1@-665,277.87 ; v1@-665,232.13 v1@-665,277.87
  Layer 4 w8: v1(-441.27,-180.99) -441.27,-181.28 -423.92,-198.63 C27.2 -423.92,-200 -343.93,-279.99 U2.19 ; v1(-420,-525) -400.2,-505.2 R8.1 -398.68,-505.2 -370.88,-533 C25.2 -341.22,-533 -317.18,-508.96 U2.4 -298.59,-491.67 -291.96,-491.67 -284.67,-498.96 -284.67,-505.59 U2.3 ; U2.1 -274.35,-550.95 -274.35,-552.25 C23.2 ; U2.46 -212.18,-523.06 -169.26,-565.98 -168.71,-566.53 C26.2 ; U2.43 -170.42,-481.44 -126.59,-525.27 C24.1 ; U2.37 -86.9,-398.11 -41.87,-443.14 C22.2 -43.64,-443.64 v1(-60,-460) ; R10.1 -69.44,454.64 -42.52,454.64 v1(-41.99,454.11) ; U5.13 379.68,382.37 380.16,382.84 v1(409.14,382.84) ; U5.8 472.5,596.02 C13.2 v1(494.02,640.86)
  Layer 4 w12: C23.2 -169.26,-565.98 -128.86,-525.59 C24.1
  Layer 4 w20: v1(-664.03,232.13) -641.16,255 v1(-664.03,277.87)
  Layer 4 w24: v1(-664.03,232.13) v1(-664.03,255) v1(-664.03,277.87)
  Layer 4 w30: v1(-664.03,255) -406.27,255 C7.2 C8.2 -403.85,419.91 -433.2,449.26 L1.1
  other v1: 614.28,-395.92 645.78,-395.92
12V: C9.2 C10.2 C12.1 CON1.1 R9.1 U3.5 U4.4 U4.11 | length 1552.1
  Layer 2 w47.24: v1@623.92,-125.75 v1(623.92,131.24)
  Layer 4 w18: U4.11 597.4,-91.7 v1(618.49,-112.79) v1(618.49,-131.19) ; U4.4 493.12,87.58 579.09,87.58 C12.1 581.5,90 615,90 623.75,98.75 v1(623.75,109.85) ; v1@623.92,110.02 v1(623.92,131.24)
  Layer 4 w31.5: C9.2 -165.81,251.71 C9.2@-165,250.9 ; C9.2@-165,254.84 C9.2@-165,250.9 ; CON1.1 -55,243.93 ; v1(623.92,131.24) 623.92,186.1 566.09,243.93 -55,243.93 ; C9.2@-165,250.9 -159.9,245.8 -155.96,245.8 -154.09,243.93 -55,243.93
  Layer 4 w36: C9.2 C9.2@-165,254.84
BLK: R4.1 U2.42 | length 187.5
  Layer 4 w8: U2.42 -138.18,-485.53 -124.79,-485.53 R4.1
BOOT: C5.2 Q2.3 R8.2 U2.9 | length 974
  Layer 4 w8: U2.9 -386.78,-439.36 -424.78,-477.36 R8.2 -426.81,-477.17 -457.18,-446.81 C5.2 -457.18,-407.82 -536.28,-328.72 -536.28,-238.53 -418.12,-120.37 -339.5,-120.37 -305,-85.87 -305,155 -294.84,165.16 Q2.3
CS: TP5.1 U2.21 | length 959
  Layer 2 w8: v1(-341.16,-164.67) 277,-164.67 393.77,-281.44 v1(448.02,-281.44) v1(479.51,-281.44)
  Layer 4 w8: v1@-341.16,-172.67 -341.16,-226.87 U2.21
DC: TP6.1 U2.16 | length 1182.1
  Layer 2 w8: v1(-428.57,-301.11) -353.66,-226.2 274.18,-226.2 350,-302.02 350,-420.42 v1(448.02,-518.44) v1(479.51,-518.44)
  Layer 4 w8: v1(-428.57,-301.11) -427.46,-300 -408.52,-300 -386.78,-321.74 U2.16
DTR: CON1.4 Q3.2 R17.2 | length 230.1
  Layer 4 w8: R17.2 -187.51,14.16 -187.51,-23.27 Q3.2 -60.78,-150 CON1.4
EN: U2.31 U4.22 U4.24 U4.26 | length 922.8
  Layer 4 w8: U2.31 -112.6,-250 91.71,-250 125.01,-216.7 125.01,-110.21 ; 125,-110.2 125,25.03 161.81,61.84 U4.24 294.67,61.84 295,61.51 ; U4.22 253.47,10 290.31,10 295,14.69 295,61.51 ; U4.26 290.31,113.02 295,108.33 295,61.51
GND: C1.1 C2.1 C3.1 C4.1 C5.1 C7.1 C8.1 C9.1 C10.1 C13.1 C14.1 C14.2 C15.1 C16.2 C17.1 C18.2 C19.2 C20.1 C21.1 C22.1 C23.1 C24.2 C25.1 C26.1 C27.1 CON1.2 LED1.6 LED2.6 LED3.6 LED4.6 Q1.2 R5.2 R6.2 R11.2 TP1.1 TP7.1 TP10.1 U1.4 U1.8 U2.0 U3.2 U4.6 U4.7 U4.10 U4.12 U4.13 U4.14 U4.19 U4.20 U4.28 U4.29 U5.1 U5.9 U5.10 U5.11 U5.18 | length 119
  Layer 2 w8: v1(614.28,-312.08) v1(645.78,-312.08)
  Layer 4 w8: U5.10 478.04,556.65 C14.1
  other v1: -150,-795 -270,-775 255,-765 -195,-740 320,-725 -421.76,-716.76 245,-715 -457.53,-706.35 -300,-705 -407.84,-702.84 410,-690 -393.92,-688.92 -120,-685 -380,-675 200,-675 -459.98,-665.01 -250,-665 -361.07,-656.14 -473.9,-651.09 -347.15,-642.22 -487.82,-637.17 -333.23,-628.3 -501.74,-623.25 -165,-620 -319.32,-614.38 -399.73,-611.85 -305.4,-600.46 -416.94,-597.83 -385.81,-597.93 -291.48,-586.54 -430.86,-583.91 -371.89,-584.01 -545,-575 560,-575 -444.78,-569.99 -357.97,-570.09 -458.7,-556.07 -344.05,-556.17 -472.62,-542.15 195,-540 -486.54,-528.23 60,-505 -256.56,-463.71 75,-440 -284.39,-435.87 -228.72,-435.87 -312.23,-408.03 -256.56,-408.03 -200.88,-408.03 -340.07,-380.19 -284.39,-380.19 -228.72,-380.19 90,-375 -312.23,-352.35 -256.56,-352.35 45,-345 -284.39,-324.51 -580,-300 390,-235 485,-210 539.31,-175.7 -655,-175 -570,-175 -372.31,-148.27 810,-140 570,-130 350.32,-96.92 397.31,-96.92 350.32,-65.43 397.31,-65.43 -831.64,-59.66 -505,-60 350.32,-33.93 397.31,-33.93 -505,-10 350.32,-2.44 397.31,-2.44 -87.54,10.07 -14.79,13.35 350.32,29.05 397.31,29.05 350.32,60.55 397.31,60.55 -505,75 -96.59,79.45 350.32,92.04 397.31,92.04 -350,105 145,120 -490,125 -760,135 -610,140 -165,150 400,150 340,155 -390,165 545,170 -785,175 -575,180 -515,185 -165,190 145,195 205,200 335,200 530,200 655,205 -245,210 -325,215 -285,230 -715,235 -755,270 -285,270 100,300 405,300 320,305 495,310 -285,315 -490,325 -710,350 -285,350 -625,360 -535,360 -330,380 -310,380 -235,385 -257.71,385.79 -45,390 95,400 300,410 675,420 -595,440 425,440 -505,455 620,485 65,495 550,510 -187.99,512.7 -156.49,512.7 -125,512.7 300,535 331.49,535 362.99,535 -505,545 300,566.49 331.49,566.49 362.99,566.49 550,570 300,597.99 331.49,597.99 362.99,597.99 -180,600 -375,605 -225,685 -395,695 190,695 -310,700 360,710 275,725 215,745 -265,755 130,805
GPIO0: Q3.3 U2.23 | length 173.3
  Layer 4 w8: U2.23 -288.04,-223.01 -303.61,-207.43 -303.61,-163.61 -268.83,-128.83 Q3.3
IIC_SCL: R2.1 U1.7 U2.35 U5.23 | length 1444.9
  Layer 1 w8: v1(-82.04,-331.06) -120,-293.11 -120,277.54 -110.63,286.91 v1(-25.12,286.91) ; U1.7 v1@-25,286.95 ; v1(-25,345) 140.94,510.94 R2.1
  Layer 4 w8: U2.35 -100.57,-349.58 v1(-82.04,-331.06) ; v1(-25.12,286.91) -25,287.02 v1(-25,345) ; v1(141.14,554.27) 205.63,554.27 215,563.64 215,586.65 224.37,596.02 U5.23
IIC_SDA: R3.1 U1.6 U2.38 U5.24 | length 1546.2
  Layer 1 w8: v1(-120.73,-376.57) -120.73,-374.34 -135.88,-359.19 -135.88,303.28 -126.51,312.65 15.63,312.65 25,303.28 ; U1.6 25,303.28 ; R3.1 188.74,529.16 25,365.42 25,303.28
  Layer 4 w8: v1(-120.73,-376.57) -120.73,-390.31 -100.82,-410.22 U2.38 ; v1(188.84,577.95) 188.84,606.33 198.21,615.71 U5.24
LCD_BLK: R1.2 TP9.1 | length 270
  Layer 2 w8: v1(448.02,-597.44) v1(479.51,-597.44)
  Layer 4 w8: R1.2 247.6,-610.9 423.55,-610.9 435.1,-599.35 446.1,-599.35 v1(448.02,-597.44)
LED_DAT: LED1.2 U2.30 | length 672.9
  Layer 1 w8: v1(-2.65,-715.62) -2.65,-761.13 LED1.2
  Layer 2 w8: v1(-190,-299.57) -15.43,-299.57 -2.65,-312.35 v1(-2.65,-715.62)
  Layer 4 w8: v1(-190,-299.57) U2.30
MOSI: TP3.1 U2.20 | length 998.2
  Layer 2 w8: v1(-364.87,-189.55) 277.13,-189.55 414.24,-326.66 v1(448.02,-360.44) v1(479.51,-360.44)
  Layer 4 w8: v1@-364.87,-197.55 -364.87,-231 U2.20
NetANT1_1: ANT1.1 C3.2 R7.1 | length 109.3
  Layer 4 w8: ANT1.1 -542.43,-526.75 -497.33,-571.85 C3.2 -496.7,-572.38 -467.71,-601.37 R7.1
NetC4_2: C4.2 R7.2 U2.2 | length 214.7
  Layer 4 w8: R7.2 -439.24,-629.73 -410.59,-658.38 C4.2 -410.37,-658.91 -288.26,-536.8 U2.2
NetC6_1: C6.1 L1.2 U3.6
NetC6_2: C6.2 U3.1 | length 71
  Layer 4 w24: C6.2 -243.62,547.9 -230.63,560.89 U3.1@-196.38,560.89
NetC11_1: C11.1 U4.2 | length 133.8
  Layer 4 w8: C11.1 416.04,163.96 441.39,138.61 U4.2
NetC11_2: C11.2 U4.1 | length 77.4
  Layer 4 w8: C11.2 455.41,175.06 464.78,165.68 491.48,165.68 U4.1
NetC12_2: C12.2 U4.3 | length 93.9
  Layer 4 w8: U4.3 565.15,113.02 C12.2
NetC15_2: C15.2 R12.2 U4.15 U4.16 U4.17 | length 224.7
  Layer 4 w16: C15.2 R12.2 ; 213.2,-148.3 233.37,-168.48 U4.15 ; U4.16 252.68,-142.76 207.91,-142.76 233.37,-117.29 U4.17
  Layer 4 w20: C15.2 172.62,-144.8 209.86,-144.8
NetC16_1: C16.1 U5.20 | length 101.8
  Layer 4 w8: C16.1 193.9,536.97 U5.20
NetC18_1: C18.1 LED1.3 R13.2 | length 150.8
  Layer 1 w16: LED1.3@62.99,-783.46 62.99,-776.22 74.68,-764.54 C18.1
NetC19_1: C19.1 LED2.3 R14.2 | length 149.8
  Layer 1 w12: C19.1 760.81,149.42 760.81,76.68 774.5,62.99 LED2.3@783.46,62.99
NetC20_2: C20.2 LED3.3 R15.2 | length 146.4
  Layer 1 w16: C20.2 -74.68,764.12 -62.99,775.81 LED3.3@-62.99,783.46
NetC21_2: C21.2 LED4.3 R16.2 | length 133.4
  Layer 1 w15: LED4.3@-783.46,-62.99 -778.66,-62.99 -766.48,-75.18 C21.2
NetLED1_1: LED1.1 LED2.2 | length 1563.7
  Layer 1 w16: LED1.1 -56.79,-769.98 -56.79,-827.99 -40.06,-844.72 -20,-844.72 44.04,-844.72 44.46,-844.72 ccw(c0,0) 814,-230.07 814,-227.89 ccw(c798,-227.84) 814,-227.78 814,-221.21 695,-102.2 695,-18.16 713.16,0 LED2.2
NetLED2_1: LED2.1 LED3.2 | length 1562.5
  Layer 1 w16: LED3.2 0,710 20,690 100,690 205,795 cw(c217.07,782.93) 217.07,800 273.7,800 cw(c273.7,784) 274.94,799.95 ; 274.97,799.95 cw(c-6.03,-17.54) 278.79,798.63 cw(c0,0) 737.49,414.3 cw(c0,0) 778.01,332.02 cw(c0,0) 809.67,244.9 cw(c0,0) 828.69,169.73 ; LED2.1 824.25,-62.99 844.83,-42.41 ccw(c0,0) 845.83,-10.1 ccw(c829.83,-9.85) 845.83,-9.8 845.83,9.95 ccw(c0,0) 840,99.66 ccw(c0,0) 828.7,169.69
NetLED3_1: LED3.1 LED4.2 | length 1518.2
  Layer 1 w16: LED4.2 -808.8,0 cw(c-808.8,27.89) -828.52,8.17 -845.52,25.16 cw(c0,0) -839.51,103.7 cw(c0,0) -826.32,180.91 cw(c0,0) -814.96,226.65 cw(c0,0) -786.06,312.47 cw(c0,0) -768.59,353.27 cw(c0,0) -710.58,458.92 cw(c0,0) -633.85,560.15 cw(c0,0) -567.52,627.26 cw(c0,0) -382.26,754.59 cw(c0,0) -167.79,829.08 cw(c0,0) -99.66,840 cw(c0,0) -14.93,845.76 14.73,845.76 14.81,845.76 cw(c14.81,829.76) 14.99,845.76 cw(c14.81,829.76) 15.1,845.76 cw(c14.81,829.76) 15.25,845.75 cw(c0,0) 15.63,845.75 ; 15.65,845.75 cw(c0,0) 16.05,845.74 ; 16.1,845.74 cw(c15.8,829.74) 16.41,845.73 cw(c14.73,798.66) 48.04,831.96 53.5,826.5 cw(c-16.32,788.88) 62.99,788.88 LED3.1
NetQ1_1: Q1.1 R4.2 R5.1 | length 107.4
  Layer 4 w8: R4.2 R5.1 56.84,-629.68 Q1.1
NetQ1_3: Q1.3 R1.1 | length 62.2
  Layer 4 w8: Q1.3 179.68,-622.61 219.94,-622.61 R1.1 ; R1.1@222.21,-629.63 R1.1@224.32,-631.74
NetQ2_1: Q2.1 R17.1 | length 61.7
  Layer 4 w8: Q2.1 -160.95,59.12 -160.95,26.98 R17.1
NetQ3_1: Q3.1 R18.1 | length 62.4
  Layer 4 w8: Q3.1 -240.26,-27.29 -240.26,13.08 R18.1
NetR6_1: R6.1 U1.5 | length 78.2
  Layer 1 w8: U1.5 75.08,114.26 75.08,185.4 R6.1@80,190.32
NetR9_2: R9.2 U3.4
NetR10_2: R10.2 R11.1 U3.3 | length 106.9
  Layer 4 w8: U3.3 -120.51,553.1 -102.9,535.49 R11.1 -70.65,534.8 -70.65,495.22 R10.2
NetR12_1: R12.1 U4.18 | length 91
  Layer 4 w8: R12.1 177.97,-72.11 198.13,-72.11 216.24,-90.22 251.33,-90.22 U4.18
PWM1: U2.39 U4.27 | length 992.7
  Layer 1 w8: v1(-95.09,-445.09) -58.82,-408.82 -58.82,-319.79 -105.14,-273.47 -105.14,-70.28 -95.77,-60.91 187.02,-60.91 196.39,-51.53 v1(196.39,138.61)
  Layer 4 w8: U2.39 v1(-95.09,-445.09) ; v1(196.39,138.61) U4.27
PWM2: U2.24 U4.25 | length 788.8
  Layer 2 w8: v1(-165,-115) 155.3,-115 175.3,-95 v1(175.3,87.3)
  Layer 4 w8: U2.24 -242.25,-178.52 -174.37,-178.52 -165,-169.15 v1(-165,-115) ; v1(175.3,87.3) 252.67,87.3 U4.25
PWM3: U2.34 U4.23 | length 659.6
  Layer 4 w8: U2.34 -114.74,-334.36 -103.04,-322.66 -103.04,-322.36 -45.68,-265 96.5,-265 145,-216.5 145,17.53 163.72,36.25 U4.23
RST: TP2.1 U2.22 | length 1096.5
  Layer 2 w8: v1(-319.86,-139.2) 536.05,-139.2 v1(614.28,-217.43) v1(645.78,-217.43)
  Layer 4 w8: v1@-319.86,-147.2 -319.86,-219.03 -301.96,-236.93 U2.22
RTS: CON1.3 Q2.2 R18.2 | length 415.4
  Layer 4 w8: R18.2 -270.55,22.16 -270.55,51.36 -215.45,106.46 -136.46,106.46 -125,95 -125,-40.63 -115.63,-50 CON1.3
SCLK: TP4.1 U2.17 | length 1187.5
  Layer 2 w8: v1(-455.35,-278.29) -388.76,-211.7 279.48,-211.7 370,-302.22 370,-361.42 v1(448.02,-439.44) v1(479.51,-439.44)
  Layer 4 w8: v1(-455.35,-278.29) -402.4,-278.29 -372.86,-307.83 U2.17
TOUCH1: TP11.1 U2.12 | length 1218.6
  Layer 2 w8: v1(-450,-380) -431.76,-361.76 -415.37,-361.76 -323.08,-269.47 258.02,-269.47 267.39,-278.84 267.39,-593.42 291.4,-617.42 v1(291.4,-657.33) v1(322.89,-657.33)
  Layer 4 w8: v1(-450,-380) -430.47,-399.53 -429.16,-399.53 U2.12
TOUCH2: TP12.1 U2.13 | length 1200.4
  Layer 2 w8: v1(-480,-345) -419.24,-345 -329.21,-254.97 255.44,-254.97 255.94,-255.47 263.81,-255.47 281.39,-273.05 281.39,-280.92 291.4,-290.92 v1(291.4,-571.25) v1(322.89,-571.25)
  Layer 4 w8: v1(-480,-345) -447.04,-345 -428.54,-363.5 U2.13
TOUCH3: TP13.1 U2.18 | length 1253
  Layer 2 w8: v1(-485.17,-255.84) -485.17,-293.89 -455.6,-323.47 -418.47,-323.47 -335.46,-240.46 268.64,-240.46 322.89,-294.71 v1(322.89,-489.16)
  Layer 4 w8: v1(-485.17,-255.84) -397.01,-255.84 -358.94,-293.91 U2.18
U: TP14.1 U4.5 | length 452.3
  Layer 4 w16: U4.5 666.84,61.84 695,90 695,255.5 675.5,275 630,275
  other v1: 608,266.94 637.38,285.92
U0_RXD: CON1.7 U2.40 | length 1545.8
  Layer 2 w8: v1(-141.74,-408.96) -142.41,-408.29 -142.41,-385.06 -242.62,-284.85 -309.85,-284.85 -426,-401 -461.97,-401 -511,-351.97 -511,-211.1 -387.67,-87.77 95.63,-87.77 105,-78.4 v1(105,45)
  Layer 4 w8: v1(-141.74,-408.96) -141.74,-426.28 U2.40 ; CON1.7 40,45 v1(105,45)
U0_TXD: CON1.8 U2.41 | length 1656.5
  Layer 2 w8: v1(-163.58,-432.3) -165.42,-430.46 -165.42,-383.59 -249.32,-299.69 -303.34,-299.69 -418.65,-415 -469.37,-415 -525,-359.37 -525,-205.1 -390.86,-70.96 72.9,-70.96 82.27,-61.59 82.27,119.73 v1(111.13,148.58)
  Layer 4 w8: v1(-163.58,-432.3) U2.41 ; CON1.8@42.5,147.5 43.58,148.58 v1(111.13,148.58)
U1_RXD: CON1.5 U2.28 | length 285.6
  Layer 4 w8: U2.28 -165.54,-219.43 -24.43,-219.43 CON1.5
U1_TXD: CON1.6 U2.29 | length 504.6
  Layer 4 w8: U2.29 -152.93,-234.65 84.05,-234.65 111.01,-207.7 111.01,-116.01 CON1.6
V: TP15.1 U4.8 | length 666.7
  Layer 4 w16: U4.8 675.07,-14.93 727.43,37.43 727.43,265.62 643.05,350 580,350
  other v1: 565.75,341.22 595.13,360.2
W: TP16.1 U4.9 | length 815.8
  Layer 4 w16: U4.9 686.21,-40.52 753.08,26.35 753.08,278.51 601.59,430 554.38,430 540,430
  other v1: 525,415 554.38,433.98
pads on no net: ANT1. LED1.4 LED2.4 LED3.4 LED4.1 LED4.4 U1.3 U2.5 U2.6 U2.7 U2.8 U2.10 U2.11 U2.14 U2.15 U2.25 U2.26 U2.27 U2.32 U2.33 U2.36 U2.44 U2.45 U2.47 U2.48 U4.21 U5.2 U5.3 U5.4 U5.5 U5.6 U5.7 U5.12 U5.14 U5.15 U5.16 U5.17 U5.19 U5.21 U5.22

## Polygon pours and split planes (outlines as drawn)
GND on Layer 3 "NONET_L-01_P-001" (solid, remove dead copper, pour order 2): -866.14,0 ccw(c0,0) 0,-866.14 ccw(c0,0) 866.14,0 ccw(c0,0) 0,866.14 ccw(c0,0)
GND on Layer 1 "NONET_L-01_P-001" (solid, remove dead copper, pour order 0): -866.14,0 ccw(c0,0) 0,-866.14 ccw(c0,0) 866.14,0 ccw(c0,0) 0,866.14 ccw(c0,0)
GND on Layer 2 "NONET_L-01_P-001" (solid, remove dead copper, pour order 1): -866.14,0 ccw(c0,0) 0,-866.14 ccw(c0,0) 866.14,0 ccw(c0,0) 0,866.14 ccw(c0,0)
GND on Layer 4 "NONET_L-01_P-001" (solid, remove dead copper, pour order 3): -866.14,0 ccw(c0,0) 0,-866.14 ccw(c0,0) 866.14,0 ccw(c0,0) 0,866.14 ccw(c0,0)

## Keep-outs
Keep-Out Layer:
  circle w0.5: c196.85,340.95 r39.37
  circle w0.5: c-393.7,0 r39.37
  circle w0.5: c196.85,-340.95 r39.37
  circle w0.5: c0,0 r866.14

## Other copper
Layer 1:
  pour cut-out: 118.11,340.95 ccw(c196.85,340.95) 196.85,262.21 ccw(c196.85,340.95) 275.59,340.95 ccw(c196.85,340.95) 196.85,419.7 ccw(c196.85,340.95)
  pour cut-out: -393.7,-78.74 ccw(c-393.7,0) -314.96,0 ccw(c-393.7,0) -393.7,78.74 ccw(c-393.7,0) -472.44,0 ccw(c-393.7,0)
  pour cut-out: 118.11,-340.95 ccw(c196.85,-340.95) 196.85,-419.7 ccw(c196.85,-340.95) 275.59,-340.95 ccw(c196.85,-340.95) 196.85,-262.21 ccw(c196.85,-340.95)
  pour cut-out: -1015.86,-55 -894.74,-55 -502.45,-447.29 -502.45,-506.31 -644.82,-648.67
Layer 2:
  pour cut-out: -1006.49,-70 -880.12,-70 -502.45,-447.67 -502.45,-506.31 -644.82,-648.67
Layer 3:
  pour cut-out: -1006.49,-70 -881.63,-70 -502.45,-449.18 -502.45,-506.31 -644.82,-648.67
Layer 4:
  pour cut-out: -415,561.79 -415,416.84 -305,416.84 -305,561.79
  pour cut-out: 118.11,340.95 ccw(c196.85,340.95) 196.85,262.21 ccw(c196.85,340.95) 275.59,340.95 ccw(c196.85,340.95) 196.85,419.7 ccw(c196.85,340.95)
  pour cut-out: -393.7,-78.74 ccw(c-393.7,0) -314.96,0 ccw(c-393.7,0) -393.7,78.74 ccw(c-393.7,0) -472.44,0 ccw(c-393.7,0)
  pour cut-out: 118.11,-340.95 ccw(c196.85,-340.95) 196.85,-419.7 ccw(c196.85,-340.95) 275.59,-340.95 ccw(c196.85,-340.95) 196.85,-262.21 ccw(c196.85,-340.95)
  pour cut-out: -542.11,-553.16 -410.86,-684.41 -384.86,-658.41 -516.11,-527.16
  pour cut-out: -1000.24,-80 -872.02,-80 -502.45,-449.57 -502.45,-506.31 -644.82,-648.67
  region net TOUCH1: 336.5,-633.01 347.18,-643.69 347.18,-670.55 337.72,-679.89 278.38,-679.89 268.55,-670.06 268.55,-644.71 280.25,-633.01
  region net TOUCH2: 336.5,-546.93 347.18,-557.61 347.18,-584.48 337.72,-593.81 278.38,-593.81 268.55,-583.98 268.55,-558.64 280.25,-546.93
  region net TOUCH3: 336.15,-464.83 346.83,-475.52 346.83,-502.38 337.37,-511.71 278.03,-511.71 268.2,-501.88 268.2,-476.54 279.9,-464.83
  region net 3V3: 658.8,-371.53 669.48,-382.21 669.48,-409.08 660.02,-418.41 600.68,-418.41 590.85,-408.58 590.85,-383.24 602.55,-371.53
  region net GND: 658.8,-287.69 669.48,-298.37 669.48,-325.24 660.02,-334.57 600.68,-334.57 590.85,-324.74 590.85,-299.4 602.55,-287.69
  region net RST: 658.8,-193.04 669.48,-203.72 669.48,-230.58 660.02,-239.91 600.68,-239.91 590.85,-230.08 590.85,-204.74 602.55,-193.04
  region net CS: 493.12,-257.12 503.8,-267.8 503.8,-294.67 494.34,-304 435,-304 425.17,-294.17 425.17,-268.83 436.87,-257.12
  region net MOSI: 493.12,-336.12 503.8,-346.8 503.8,-373.67 494.34,-383 435,-383 425.17,-373.17 425.17,-347.83 436.87,-336.12
  region net SCLK: 493.12,-415.12 503.8,-425.8 503.8,-452.67 494.34,-462 435,-462 425.17,-452.17 425.17,-426.83 436.87,-415.12
  region net DC: 493.12,-494.12 503.8,-504.8 503.8,-531.67 494.34,-541 435,-541 425.17,-531.17 425.17,-505.83 436.87,-494.12
  region net LCD_BLK: 493.12,-573.12 503.8,-583.8 503.8,-610.67 494.34,-620 435,-620 425.17,-610.17 425.17,-584.83 436.87,-573.12
  region net NetR9_2: -131.93,389.26 -131.93,479.04 -108.04,479.04 -108.04,389.26
  region net 12V: -187.26,404.13 -168.86,422.53 -168.86,479.25 -144,479.25 -144,230 -185,230 -187.26,232.26
  region net NetC6_1: -184.48,479.48 -204.48,479.48 -228.99,503.99 -290,503.99 -290,440.03 -184.48,440.03
  region net U: 587.3,290.17 596.21,299.08 654.63,299.08 662.3,291.42 662.3,254.45 656.44,248.6 608.97,248.6 587.3,270.27
  region net V: 544.02,366.22 552.94,375.14 611.36,375.14 619.02,367.48 619.02,330.5 613.17,324.65 551.96,324.65 544.02,332.59
  region net W: 502.29,443.72 511.21,452.63 569.63,452.63 577.29,444.97 577.29,408 571.44,402.15 510.24,402.15 502.29,410.09

## Silkscreen, mask and mechanical layers (free items; w line width, h text height)
Top Overlay:
  circle w5: c196.85,-340.95 r78.74
  circle w5: c196.85,340.95 r78.74
  circle w5: c-393.7,0 r78.74
  text "SuperKnob" at -165,130 h60 r90
  text "RST" at 515.48,-234.53 h25
  text "CS" at 360,-300 h25
  text "GND" at 512.66,-327.91 h25
  text "MOSI" at 332.95,-378.26 h25
  text "3V3" at 512.66,-412.06 h25
  text "SCLK" at 329.98,-455.42 h25
  text "Touch3" at 138.73,-506.19 h25
  text "DC" at 365.27,-534.64 h25
  text "GND" at 550.03,-553.95 h25
  text "Touch2" at 137.52,-588.66 h25
  text "LCD" at 352.65,-613.44 h25
  text "Touch1" at 143.32,-675 h25
Mechanical 8:
  lines w0.5: -98.43,0 0,0 ; 0,-98.43 0,0 ; 0,98.43 0,0 ; 98.42,0 0,0